# Allegro board KB_GH60.brd
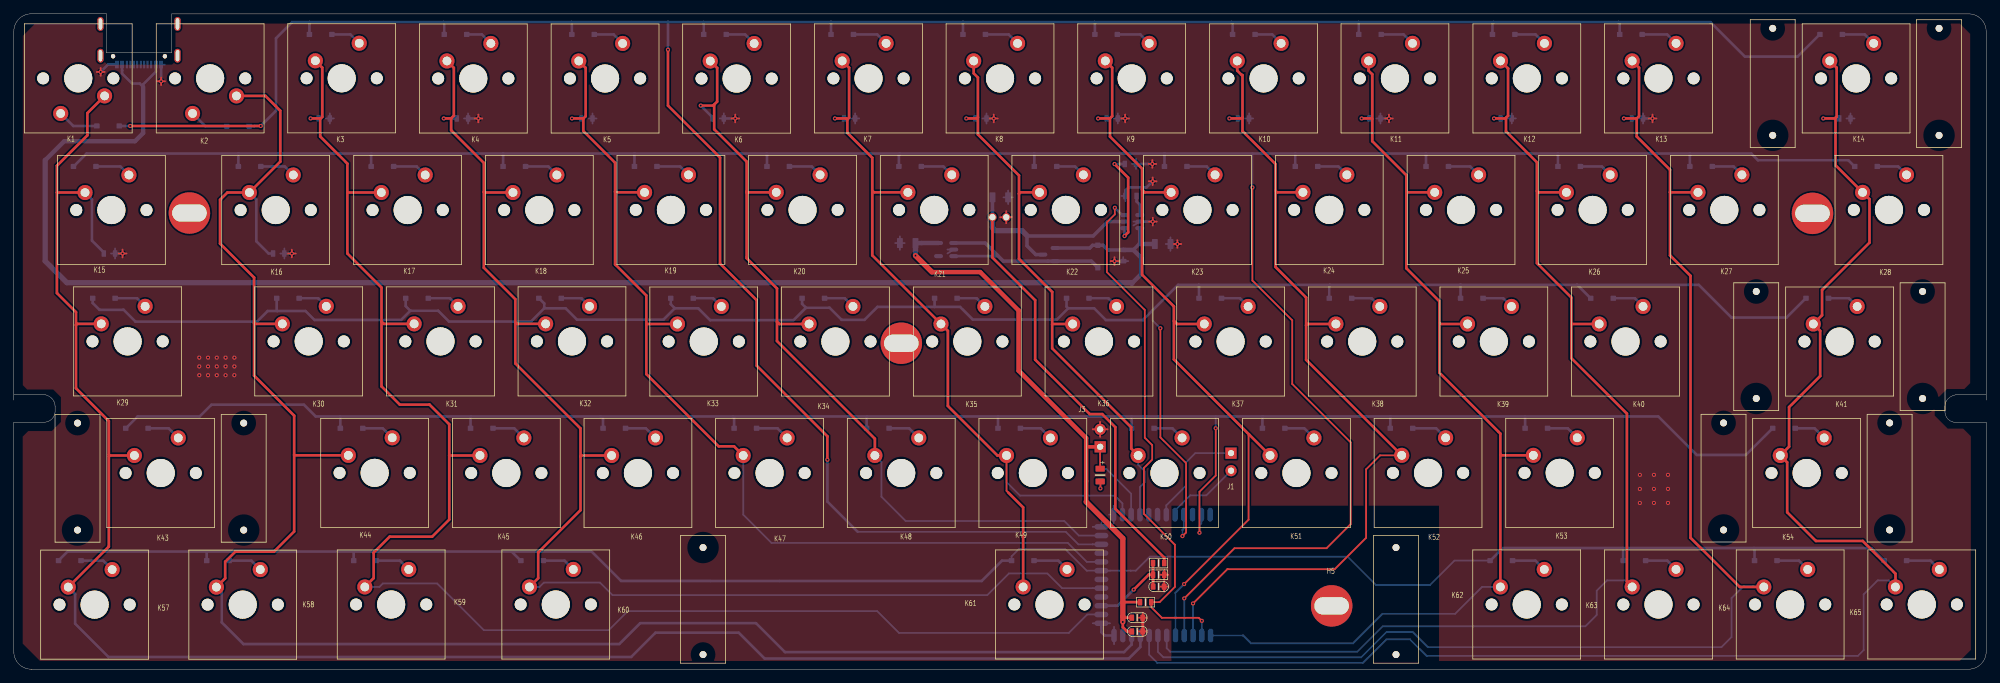
[diagram p0: board, top side]
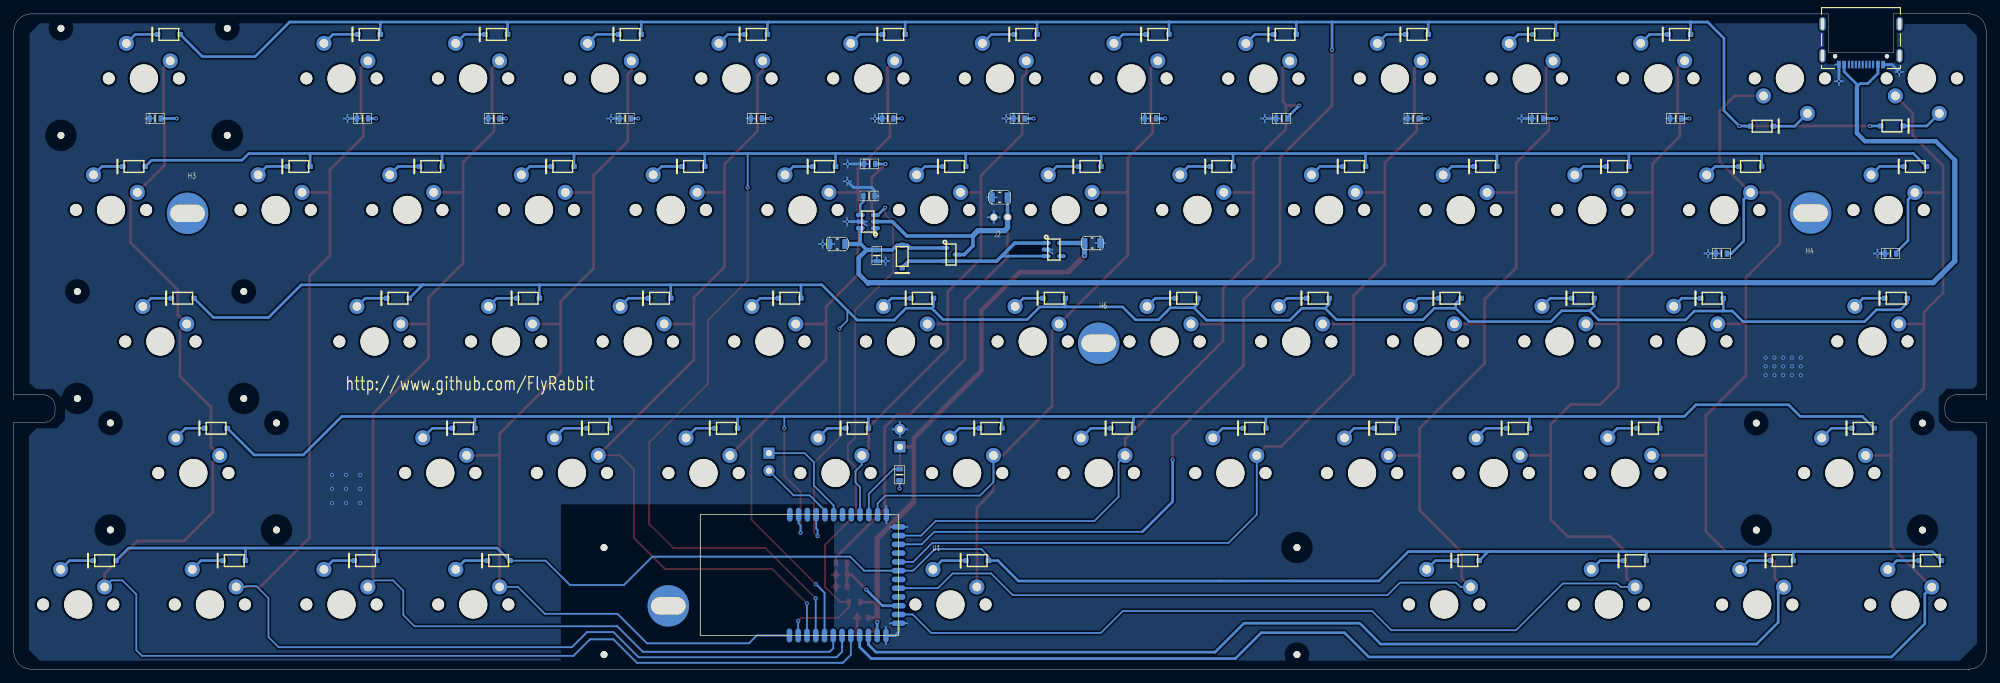
[diagram p1: board, bottom side, seen from below]

Outline 285.35 x 94.93 mm; copper layers: TOP, BOTTOM. Coordinates in mm from the lower left corner of the outline.
Outline path: 0,38.96 0,92.39 arc(0.74,94.19) 2.54,94.93 13.42,94.93 13.42,89.28 22.85,89.28 22.85,94.92 282.81,94.92 arc(284.61,94.18) 285.35,92.38 285.35,38.96 ; 0,35.77 0,35.77 4.36,35.77 arc(5.5,36.24) 5.97,37.38 5.97,38.05 arc(5.85,38.7) 5.48,39.24 arc(4.86,39.66) 4.12,39.81 0,39.81 ; 0,35.77 0,2.53 arc(0.74,0.74) 2.52,0 2.66,0 ; 2.45,0 282.81,0 arc(284.61,0.74) 285.35,2.54 ; 285.35,35.75 280.94,35.75 arc(279.84,36.21) 279.39,37.3 279.39,38.09 arc(279.51,38.67) 279.84,39.16 arc(280.52,39.62) 281.33,39.79 285.34,39.79 ; 285.35,2.5 285.35,35.76

## Design rules (mm)
constraint set DEFAULT: min track width 0.127

## Placement (name value [footprint] x y rotation side)
C1  10uF  [C0805]  166.21 61.58 0 bottom
C2  10uF  [C0805]  142.72 68.35 180 bottom
C3  10uF  [C0805]  129.32 61.72 180 bottom
C5  100nF  [C0603]  162.53 5.47 0 top
C6  10nF  [C0603]  162.53 7.46 0 top
C7  100nF  [C0603]  165.62 11.96 0 top
D6  1N4448W  [SOD123]  13.63 78.68 180 bottom
D7  1N4448W  [SOD123]  32.42 78.65 180 bottom
D8  1N4448W  [SOD123]  44.39 91.94 0 bottom
D9  1N4448W  [SOD123]  63.89 91.94 0 bottom
D10  1N4448W  [SOD123]  82.35 91.94 0 bottom
D11  1N4448W  [SOD123]  101.44 91.94 0 bottom
D12  1N4448W  [SOD123]  119.86 91.94 0 bottom
D13  1N4448W  [SOD123]  138.94 91.94 0 bottom
D14  1N4448W  [SOD123]  158.03 91.94 0 bottom
D15  1N4448W  [SOD123]  177.95 91.94 0 bottom
D16  1N4448W  [SOD123]  196.2 91.94 0 bottom
D17  1N4448W  [SOD123]  215.54 91.94 0 bottom
D18  1N4448W  [SOD123]  233.96 91.94 0 bottom
D19  1N4448W  [SOD123]  262.93 91.94 0 bottom
D20  1N4448W  [SOD123]  10.25 72.82 0 bottom
D21  1N4448W  [SOD123]  34.11 72.82 0 bottom
D22  1N4448W  [SOD123]  53.32 72.82 0 bottom
D23  1N4448W  [SOD123]  72.41 72.82 0 bottom
D24  1N4448W  [SOD123]  91.41 72.82 0 bottom
D25  1N4448W  [SOD123]  110.58 72.82 0 bottom
D26  1N4448W  [SOD123]  129.67 72.82 0 bottom
D27  1N4448W  [SOD123]  149.26 72.82 0 bottom
D28  1N4448W  [SOD123]  168.1 72.82 0 bottom
D29  1N4448W  [SOD123]  187.01 72.82 0 bottom
D30  1N4448W  [SOD123]  205.93 72.82 0 bottom
D31  1N4448W  [SOD123]  225.02 72.82 0 bottom
D32  1N4448W  [SOD123]  244.11 72.82 0 bottom
D33  1N4448W  [SOD123]  267.97 72.82 0 bottom
D34  1N4448W  [SOD123]  13.04 53.73 0 bottom
D35  1N4448W  [SOD123]  39.66 53.73 0 bottom
D36  1N4448W  [SOD123]  58.33 53.73 0 bottom
D37  1N4448W  [SOD123]  77.58 53.73 0 bottom
D38  1N4448W  [SOD123]  96.67 53.73 0 bottom
D39  1N4448W  [SOD123]  115.67 53.73 0 bottom
D40  1N4448W  [SOD123]  134.84 53.73 0 bottom
D41  1N4448W  [SOD123]  153.93 53.73 0 bottom
D42  1N4448W  [SOD123]  173.1 53.73 0 bottom
D43  1N4448W  [SOD123]  191.93 53.73 0 bottom
D44  1N4448W  [SOD123]  210.94 53.73 0 bottom
D45  1N4448W  [SOD123]  229.77 53.73 0 bottom
D46  1N4448W  [SOD123]  260.91 53.73 0 bottom
D47  1N4448W  [SOD123]  17.81 34.89 0 bottom
D48  1N4448W  [SOD123]  48.87 34.89 0 bottom
D49  1N4448W  [SOD123]  67.7 34.89 0 bottom
D50  1N4448W  [SOD123]  86.87 34.89 0 bottom
D51  1N4448W  [SOD123]  105.83 34.89 0 bottom
D52  1N4448W  [SOD123]  125 34.89 0 bottom
D53  1N4448W  [SOD123]  144.01 34.89 0 bottom
D54  1N4448W  [SOD123]  163.35 34.89 0 bottom
D55  1N4448W  [SOD123]  182.26 34.89 0 bottom
D56  1N4448W  [SOD123]  200.77 34.89 0 bottom
D57  1N4448W  [SOD123]  220.27 34.89 0 bottom
D58  1N4448W  [SOD123]  256.1 34.89 0 bottom
D59  1N4448W  [SOD123]  8.1 15.73 0 bottom
D60  1N4448W  [SOD123]  29.53 15.73 0 bottom
D61  1N4448W  [SOD123]  50.79 15.73 0 bottom
D62  1N4448W  [SOD123]  74.98 15.73 0 bottom
D63  1N4448W  [SOD123]  145.97 15.73 0 bottom
D64  1N4448W  [SOD123]  215.21 15.73 0 bottom
D65  1N4448W  [SOD123]  234.46 15.73 0 bottom
D66  1N4448W  [SOD123]  253.46 15.73 0 bottom
D67  1N4448W  [SOD123]  272.22 15.73 0 bottom
D68  LED_G  [LED0805]  157.16 28.12 90 top
D69  1N4448W  [SOD123]  156.83 59.78 270 bottom
H3  HOLE_M2.5X5  [M2D5X5]  260.22 66.03 180 bottom
H4  HOLE_M2.5X5  [M2D5X5]  25.41 66.08 180 bottom
H5  HOLE_M2.5X5  [M2D5X5]  190.66 9.17 0 top
H6  HOLE_M2.5X5  [M2D5X5]  128.4 47.22 180 bottom
J1  -  [HEADER2X1]  176.11 31.3 0 bottom
J2  PH2.0_2X1  [PH2D0_2X1]  141.58 65.47 0 bottom
J3  -  [HEADER2X1]  157.16 32.21 180 bottom
K1  -  [KEYPAD]  9.32 85.58 180 top
K2  -  [KEYPAD]  28.4 85.58 180 top
K3  -  [KEYPAD]  47.43 85.59 0 top
K4  -  [KEYPAD]  66.47 85.56 0 top
K5  -  [KEYPAD]  85.54 85.56 0 top
K6  -  [KEYPAD]  104.57 85.55 0 top
K7  -  [KEYPAD]  123.66 85.57 0 top
K8  -  [KEYPAD]  142.68 85.57 0 top
K9  -  [KEYPAD]  161.73 85.57 0 top
K10  -  [KEYPAD]  180.81 85.57 0 top
K11  -  [KEYPAD]  199.81 85.57 0 top
K12  -  [KEYPAD]  218.9 85.57 0 top
K13  -  [KEYPAD]  237.95 85.57 0 top
K14  -  [KEYPAD]  266.54 85.57 0 top
K15  -  [KEYPAD]  14.12 66.5 0 top
K16  -  [KEYPAD]  37.89 66.5 0 top
K17  -  [KEYPAD]  56.98 66.51 0 top
K18  -  [KEYPAD]  76.02 66.51 0 top
K19  -  [KEYPAD]  95.07 66.53 0 top
K20  -  [KEYPAD]  114.11 66.53 0 top
K21  -  [KEYPAD]  133.16 66.53 0 top
K22  -  [KEYPAD]  152.2 66.53 0 top
K23  -  [KEYPAD]  171.25 66.53 0 top
K24  -  [KEYPAD]  190.31 66.53 0 top
K25  -  [KEYPAD]  209.38 66.53 0 top
K26  -  [KEYPAD]  228.42 66.53 0 top
K27  -  [KEYPAD]  247.47 66.53 0 top
K28  -  [KEYPAD]  271.29 66.53 0 top
K29  -  [KEYPAD]  16.46 47.48 0 top
K30  -  [KEYPAD]  42.66 47.48 0 top
K31  -  [KEYPAD]  61.73 47.48 0 top
K32  -  [KEYPAD]  80.75 47.48 0 top
K33  -  [KEYPAD]  99.82 47.46 0 top
K34  -  [KEYPAD]  118.86 47.46 0 top
K35  -  [KEYPAD]  137.95 47.46 0 top
K36  -  [KEYPAD]  157 47.46 0 top
K37  -  [KEYPAD]  176.04 47.46 0 top
K38  -  [KEYPAD]  195.08 47.46 0 top
K39  -  [KEYPAD]  214.13 47.46 0 top
K40  -  [KEYPAD]  233.17 47.46 0 top
K41  -  [KEYPAD]  264.15 47.46 0 top
K43  -  [KEYPAD]  21.25 28.42 0 top
K44  -  [KEYPAD]  52.21 28.44 0 top
K45  -  [KEYPAD]  71.25 28.42 0 top
K46  -  [KEYPAD]  90.29 28.42 0 top
K47  -  [KEYPAD]  109.34 28.42 0 top
K48  -  [KEYPAD]  128.39 28.42 0 top
K49  -  [KEYPAD]  147.43 28.42 0 top
K50  -  [KEYPAD]  166.48 28.42 0 top
K51  -  [KEYPAD]  185.56 28.42 0 top
K52  -  [KEYPAD]  204.61 28.44 0 top
K53  -  [KEYPAD]  223.65 28.44 0 top
K54  -  [KEYPAD]  259.38 28.42 0 top
K57  -  [KEYPAD]  11.69 9.35 0 top
K58  -  [KEYPAD]  33.12 9.35 0 top
K59  -  [KEYPAD]  54.59 9.37 0 top
K60  -  [KEYPAD]  78.41 9.37 0 top
K61  -  [KEYPAD]  149.84 9.37 0 top
K62  -  [KEYPAD]  218.88 9.37 0 top
K63  -  [KEYPAD]  237.95 9.37 0 top
K64  -  [KEYPAD]  256.99 9.37 0 top
K65  -  [KEYPAD]  276.04 9.37 0 top
NOREF  -  [unnamed]  278.54 85.07 0 top
NOREF#2  -  [unnamed]  33.26 27.9 0 top
NOREF#3  -  [unnamed]  271.38 27.92 0 top
NOREF#4  -  [unnamed]  9.22 27.9 0 top
NOREF#5  -  [unnamed]  99.71 9.87 180 top
NOREF#6  -  [unnamed]  252.09 46.96 0 top
NOREF#7  -  [unnamed]  254.47 85.07 0 top
NOREF#8  -  [unnamed]  199.97 9.87 180 top
NOREF#9  -  [unnamed]  247.35 27.92 0 top
NOREF#10  -  [unnamed]  276.15 46.96 0 top
Q1  DMP3130L-7  [SOT-23-3]  149.76 60.06 270 bottom
R1  100K  [R0603]  13.83 60.21 180 bottom
R2  100K  [R0603]  38.32 60.21 180 bottom
R3  100K  [R0603]  44.91 79.77 180 bottom
R4  100K  [R0603]  64.91 79.77 180 bottom
R5  100K  [R0603]  82.91 79.77 180 bottom
R6  100K  [R0603]  101.91 79.77 180 bottom
R7  100K  [R0603]  120.91 79.77 180 bottom
R8  100K  [R0603]  139.91 79.77 180 bottom
R9  100K  [R0603]  158.91 79.77 180 bottom
R10  100K  [R0603]  177.91 79.77 180 bottom
R11  100K  [R0603]  196.91 79.77 180 bottom
R12  100K  [R0603]  215.91 79.77 180 bottom
R13  100K  [R0603]  234.91 79.77 180 bottom
R14  100K  [R0603]  264.91 79.77 180 bottom
R15  1K  [R0603]  161.62 68.55 0 bottom
R16  100K  [R0603]  163.74 9.71 0 top
R17  10K  [R0603]  161.54 73.19 0 bottom
R20  10K  [R0603]  157.21 28.17 270 bottom
R21  10K  [R0603]  160.5 59.92 90 bottom
R22  1M  [R0603]  165.62 15.37 180 top
R23  1M  [R0603]  165.63 13.68 0 top
U1  -  [NRF51822_MODULE]  157.34 22.38 0 bottom
U2  TPS62200DBVT  [SOT23-5]  134.88 60.78 270 bottom
U3  BQ21040DBVT  [SOT-23-6]  161.79 64.83 90 bottom
U4  USB_C  [TYPE-C-31-M-14]  18.11 91.41 0 bottom

## Library data of the parts
C1-C3 C5-C7 = CAP NP: User Part Number: pn; Tolerance: RichardLC
D6-D67 D69 = DIODE: User Part Number: pn; Tolerance: RichardLC
D68 = LED: User Part Number: pn; Tolerance: RichardLC
H3-H6 = HOLE_M3
J1-J3 = HEADER2X1
K1-K41 K43-K54 K57-K65 = keypad
Q1 = MOSFET P: User Part Number: pn; Tolerance: RichardLC
R1-R17 R20-R23 = RESISTOR: User Part Number: pn; Tolerance: RichardLC
U1 = NRF51822_MODULE
U2 = TPS62200: User Part Number: pn; Tolerance: RichardLC
U3 = BQ21040: User Part Number: pn; Tolerance: RichardLC
U4 = TYPE-C-31-M-14: User Part Number: PN; Tolerance: TOL

## Footprints (pads in the part's own frame, mm; a bottom-side part is the same pattern mirrored in y, then rotated)
C0603
  custom 0.7x0.9 smd: 1(-0.8,0) 2(0.8,0)
C0805
  custom 0.85x1.45 smd: 1(-1.13,0) 2(1.13,0)
HEADER2X1
  rect 1.624x1.624 hole 0.9: 1(0,0)
  round 1.624 hole 0.9: 2(0,2.54)
KEYPAD
  round 1.72 hole 1.72 unplated: (-5.08,0) (5.08,0)
  round 4.064 hole 4.064 unplated: (0,0)
  round 2.184 hole 1.27: 4(2.54,5.08) 5(-3.81,2.54)
LED0805
  custom 0.85x1.35 smd: 1(-0.925,0) 2(0.925,0)
M2D5X5
  round 6 hole 5x2.5: 1(0,0)
NRF51822_MODULE
  oval 0.8x2 smd: 1(15.8,17.5) 2(14.53,17.5) 3(13.26,17.5) 4(11.99,17.5) 5(10.72,17.5) 6(9.45,17.5) 7(8.18,17.5) 8(6.91,17.5) 9(5.64,17.5) 10(4.37,17.5) 11(3.1,17.5) 12(1.83,17.5) 25(1.77,0) 26(3.04,0) 27(4.31,0) 28(5.58,0) 29(6.85,0) 30(8.12,0) 31(9.39,0) 32(10.66,0) 33(11.93,0) 34(13.2,0) 35(14.47,0) 36(15.74,0)
  oval 2x0.8 smd: 13(0,15.73) 14(0,14.46) 15(0,13.19) 16(0,11.92) 17(0,10.65) 18(0,9.38) 19(0,8.11) 20(0,6.84) 21(0,5.57) 22(0,4.3) 23(0,3.03) 24(0,1.76)
PH2D0_2X1
  round 1.2 hole 0.9: 1(0,0) 2(2,0)
R0603
  custom 0.65x0.95 smd: 1(-0.812,0) 2(0.812,0)
SOD123
  custom 0.8x0.75 smd: 1(-1.625,0) 2(1.625,0)
SOT23-5
  oval 0.6x1.3 smd: 1(-0.95,-1.1) 2(0,-1.1) 3(0.95,-1.1) 4(0.95,1.1) 5(-0.95,1.1)
SOT-23-3
  oval 0.6x1.3 smd: 1(-0.95,-0.885) 2(0.95,-0.885) 3(0,0.885)
SOT-23-6
  oval 0.6x1.3 smd: 1(-0.95,-1.1) 2(0,-1.1) 3(0.95,-1.1) 4(0.95,1.1) 5(0,1.1) 6(-0.95,1.1)
TYPE-C-31-M-14
  oval 0.9x2 hole 0.5x1.65: 1(-5.577,2.548) 2(5.579,2.544) 3(-5.577,-2.047) 4(5.573,-2.051)
  round 0.61 hole 0.61: 5(-3.75,2.63) 6(3.75,2.63)
  rect 0.559x1.092 smd: A1B12(-3.2,3.83) A4B9(-2.45,3.83) B1A12(3.2,3.83) B4A9(2.45,3.83)
  rect 0.305x1.092 smd: A5(-1.25,3.83) A6(-0.25,3.83) A7(0.25,3.83) A8(1.25,3.83) B5(1.75,3.83) B6(0.75,3.83) B7(-0.75,3.83) B8(-1.75,3.83)
unnamed
  round 1 hole 3 unplated: (0,7.75)
  round 1 hole 3.98 unplated: (0,-7.75)

## Nets
D3V3: C3.1 C5.1 C6.1 D68.2 J3.1 R16.1 U1.11(VCC) U2.5
GND: C1.2 C2.1 C3.2 C5.2 C6.2 C7.2 J2.2 J3.2 R1.1 R2.1 R3.1 R4.1 R5.1 R6.1 R7.1 R8.1 R9.1 R10.1 R11.1 R12.1 R13.1 R14.1 R15.1 R17.2 R21.1 R23.2 U1.12 U1.13 U1.24 U1.25 U2.2 U3.5 U4.A1B12 U4.B1A12
VBAT: C2.2 J2.1 Q1.3 R22.1 U3.2
VBUS: C1.1 D69.1 Q1.1 R21.2 U3.6 U4.A4B9 U4.B4A9(VBUS_1)
VDD: D69.2(C) Q1.2(SOURCE) U2.1(VIN) U2.3
ADC: C7.1 R22.2 R23.1 U1.15
C1: K1.5 K15.5 K29.5 K43.5 K57.5 R1.2 U1.9
C2: K2.5 K16.5 K30.5 K44.5 K58.5 R2.2 U1.10
C3: K3.5 K17.5 K31.5 K45.5 K59.5 R3.2 U1.14
C4: K4.5 K18.5 K32.5 K46.5 K60.5 R4.2 U1.17
C5: K5.5 K19.5 K33.5 K47.5 R5.2 U1.20
C6: K6.5 K20.5 K34.5 K48.5 R6.2 U1.23
C7: K7.5 K21.5 K35.5 K49.5 K61.5 R7.2 U1.26
C8: K8.5 K22.5 K36.5 K50.5 R8.2 U1.28
C9: K9.5 K23.5 K37.5 K51.5 R9.2 U1.5
C10: K10.5 K24.5 K38.5 K52.5 R10.2 U1.3
C11: K11.5 K25.5 K39.5 K53.5 K62.5 R11.2 U1.1
C12: K12.5 K26.5 K40.5 K63.5 R12.2 U1.6
C13: K13.5 K27.5 K64.5 R13.2 U1.7
C14: K14.5 K28.5 K41.5 K54.5 K65.5 R14.2 U1.8
CHG: R16.2 U1.2 U3.3(\\C\H\G)
R1: D6.1 D7.1 D8.1 D9.1 D10.1 D11.1 D12.1 D13.1 D14.1 D15.1 D16.1 D17.1 D18.1 D19.1 U1.22
R2: D20.1 D21.1 D22.1 D23.1 D24.1 D25.1 D26.1 D27.1 D28.1 D29.1 D30.1 D31.1 D32.1 D33.1 U1.4
R3: D34.1 D35.1 D36.1 D37.1 D38.1 D39.1 D40.1 D41.1 D42.1 D43.1 D44.1 D45.1 D46.1 U1.33
R4: D47.1 D48.1 D49.1 D50.1 D51.1 D52.1 D53.1 D54.1 D55.1 D56.1 D57.1 D58.1 U1.35
R5: D59.1 D60.1 D61.1 D62.1 D63.1 D64.1 D65.1 D66.1 D67.1 U1.19
SWDCLK: J1.2 U1.32
SWDIO: J1.1 U1.31
N29595: D6.2(C) K1.4
N30020: D7.2(C) K2.4
N30323: D8.2(C) K3.4
N30854: D9.2(C) K4.4
N31668: D10.2(C) K5.4
N31769: D11.2(C) K6.4
N32003: D12.2(C) K7.4
N32220: D13.2(C) K8.4
N32445: D14.2(C) K9.4
N32807: D15.2(C) K10.4
N33468: D16.2(C) K11.4
N33965: D17.2(C) K12.4
N34548: D18.2(C) K13.4
N34712: D19.2(C) K14.4
N37140: D20.2(C) K15.4
N37156: D33.2(C) K28.4
N37885: D21.2(C) K16.4
N37889: D22.2(C) K17.4
N37893: D23.2(C) K18.4
N37897: D24.2(C) K19.4
N37901: D25.2(C) K20.4
N37905: D26.2(C) K21.4
N37909: D27.2(C) K22.4
N37913: D28.2(C) K23.4
N37917: D29.2(C) K24.4
N37921: D30.2(C) K25.4
N37925: D31.2(C) K26.4
N37929: D32.2(C) K27.4
N41655: D34.2(C) K29.4
N41746: D35.2(C) K30.4
N41796: D36.2(C) K31.4
N41988: D37.2(C) K32.4
N42035: D38.2(C) K33.4
N42065: D39.2(C) K34.4
N42098: D40.2(C) K35.4
N42134: D41.2(C) K36.4
N42173: D42.2(C) K37.4
N42405: D43.2(C) K38.4
N42450: D44.2(C) K39.4
N42498: D45.2(C) K40.4
N42549: D46.2(C) K41.4
N42959: D47.2(C) K43.4
N42978: D48.2(C) K44.4
N43023: D49.2(C) K45.4
N43049: D50.2(C) K46.4
N43078: D51.2(C) K47.4
N43110: D52.2(C) K48.4
N43145: D53.2(C) K49.4
N43183: D54.2(C) K50.4
N43224: D58.2(C) K54.4
N43268: D57.2(C) K53.4
N43315: D56.2(C) K52.4
N43365: D55.2(C) K51.4
N43658: D59.2(C) K57.4
N43699: D67.2(C) K65.4
N43722: D66.2(C) K64.4
N43748: D65.2(C) K63.4
N43777: D64.2(C) K62.4
N43809: D63.2(C) K61.4
N43844: D62.2(C) K60.4
N43882: D61.2(C) K59.4
N43923: D60.2(C) K58.4
N55988: R15.2 U3.4
N57100: R17.1 U3.1
N89884: R20.1 U1.27
N89888: D68.1(C) R20.2

Pads without a net: H3 1; H4 1; H5 1; H6 1; U1 16 18 21 29 30 34 36; U2 4; U4 1 2 3 4 5 6 A5 A6 A7 A8 B5 B6 B7 B8

## Via types
v1: diameter 0.6, hole 0.3, TOP to BOTTOM, 71 vias

## Routing (per net, layer and track width the routed paths; a pad name or vN(x,y) marks a point on that pad's centre or on a via; arc(x,y) is an arc through that point)
D3V3: length 88.1
  TOP w0.254: D68.2 157.16,31.14 J3.1
  TOP w0.381: R16.1 160.54,9.71 160.44,9.61 ; 160.44,7.65 160.63,7.46 C6.1 ; C5.1 161.07,5.47 160.44,6.09 v1(160.44,6.84) ; 155.17,27.26 155.14,27.23
  TOP w0.508: J3.1 155.19,32.21 155.14,32.25
  TOP w0.635: 132.83,57.53 139.8,57.53 145.37,51.96 145.37,43.24 155.14,33.47 155.14,24.24
  TOP w0.762: v1(130.45,59.9) 132.83,57.53 ; v1(160.44,6.84) 160.44,18.93 155.14,24.24
  BOTTOM w0.381: U1.11 v1(160.44,6.84)
  BOTTOM w0.635: C3.1 131.32,61.72 131.33,61.73 U2.5
  BOTTOM w0.762: C3.1 v1(130.45,59.9)
GND: length 180
  TOP w0.254: 165.82,11.96 C7.2 ; C7.2 167.03,11.96 ; C7.2 166.42,12.67 ; C7.2 166.42,11.26 ; v1(164.78,64.83) 164.78,65.39 ; v1(164.78,64.83) 165.34,64.83 ; v1(164.78,64.83) 164.78,64.28 ; v1(164.78,64.83) 164.23,64.83 ; v1(160.79,79.77) 160.79,80.33 ; v1(160.79,79.77) 160.23,79.77 ; v1(160.79,79.77) 160.79,79.22 ; v1(160.79,79.77) 161.34,79.77 ; v1(141.77,79.77) 141.77,80.33 ; v1(141.77,79.77) 142.33,79.77 ; v1(141.77,79.77) 141.22,79.77 ; v1(141.77,79.77) 141.77,79.22 ; 103.82,79.77 v1(104.37,79.77) ; v1(104.37,79.77) 104.37,80.33 ; v1(104.37,79.77) 104.92,79.77 ; v1(104.37,79.77) 104.37,79.22 ; 12.01,86.51 v1(12.56,86.51) ; v1(12.56,86.51) 12.56,87.07 ; v1(12.56,86.51) 12.56,85.96 ; v1(12.56,86.51) 13.12,86.51 ; v1(159.24,59.11) 159.24,59.66 ; v1(159.24,59.11) 159.24,58.55 ; v1(159.24,59.11) 159.79,59.11 ; v1(159.24,59.11) 158.68,59.11 ; 198.4,79.77 v1(198.95,79.77) ; v1(198.95,79.77) 198.95,79.22 ; v1(198.95,79.77) 199.5,79.77 ; v1(198.95,79.77) 198.95,80.33 ; 157.16,33.68 J3.2 ; J3.2 157.16,35.81 ; J3.2 158.23,34.75 ; J3.2 156.1,34.75 ; 39.67,60.21 v1(40.22,60.21) ; v1(40.22,60.21) 40.22,60.76 ; v1(40.22,60.21) 40.77,60.21 ; v1(40.22,60.21) 40.22,59.66 ; v1(67.21,79.77) 67.77,79.77 ; v1(67.21,79.77) 67.21,80.33 ; v1(67.21,79.77) 66.66,79.77 ; v1(67.21,79.77) 67.21,79.22 ; C6.2 163.33,8.17 ; C6.2 162.73,7.46 ; C6.2 163.94,7.46 ; 164.21,70.67 v1(164.76,70.67) ; v1(164.76,70.67) 164.76,71.22 ; v1(164.76,70.67) 165.32,70.67 ; v1(164.76,70.67) 164.76,70.11 ; v1(168.34,61.58) 168.89,61.58 ; v1(168.34,61.58) 167.79,61.58 ; v1(168.34,61.58) 168.34,61.03 ; v1(168.34,61.58) 168.34,62.14 ; R23.2 166.44,14.41 ; R23.2 165.86,13.68 ; R23.2 166.44,12.95 ; R23.2 167.02,13.68 ; J2.2 143.58,66.32 ; J2.2 143.58,64.61 ; J2.2 144.44,65.47 ; J2.2 142.73,65.47 ; 21.31,84.6 v1(21.31,85.16) ; v1(21.31,85.16) 20.75,85.16 ; v1(21.31,85.16) 21.86,85.16 ; v1(21.31,85.16) 21.31,85.71 ; 15.73,59.66 v1(15.73,60.21) ; v1(15.73,60.21) 15.18,60.21 ; v1(15.73,60.21) 15.73,60.76 ; v1(15.73,60.21) 16.29,60.21 ; v1(164.72,73.19) 164.72,73.74 ; v1(164.72,73.19) 164.17,73.19 ; v1(164.72,73.19) 165.28,73.19 ; v1(164.72,73.19) 164.72,72.63 ; 236.52,79.77 v1(237.08,79.77) ; v1(237.08,79.77) 237.08,80.33 ; v1(237.08,79.77) 237.08,79.22 ; v1(237.08,79.77) 237.63,79.77 ; C5.2 163.94,5.47 ; C5.2 162.73,5.47 ; C5.2 163.33,4.77
  TOP w0.381: C5.2 163.33,6.69 163.33,6.69 C6.2
  BOTTOM w0.254: 140.14,79.77 R8.1 ; R8.1 140.72,79.04 ; R8.1 140.72,80.5 ; 168.34,61.03 v1(168.34,61.58) ; v1(168.34,61.58) 168.34,62.14 ; v1(168.34,61.58) 168.89,61.58 ; v1(12.56,86.51) 12.56,87.07 ; v1(12.56,86.51) 12.56,85.96 ; v1(12.56,86.51) 12.01,86.51 ; v1(12.56,86.51) 13.12,86.51 ; R14.1 265.72,80.5 ; R14.1 266.3,79.77 ; R14.1 265.72,79.04 ; R14.1 265.14,79.77 ; v1(164.72,73.19) 164.72,73.74 ; v1(164.72,73.19) 164.72,72.63 ; v1(164.72,73.19) 165.28,73.19 ; R11.1 197.72,80.5 ; R11.1 197.72,79.04 ; R11.1 197.14,79.77 ; v1(164.76,70.67) 165.32,70.67 ; v1(164.76,70.67) 164.21,70.67 ; v1(164.76,70.67) 164.76,71.22 ; v1(164.76,70.67) 164.76,70.11 ; 67.21,79.22 v1(67.21,79.77) ; v1(67.21,79.77) 67.21,80.33 ; v1(67.21,79.77) 67.77,79.77 ; 45.72,79.04 R3.1 ; R3.1 46.3,79.77 ; R3.1 45.14,79.77 ; R3.1 45.72,80.5 ; 159.24,58.55 v1(159.24,59.11) ; v1(159.24,59.11) 159.24,59.66 ; v1(159.24,59.11) 158.68,59.11 ; 160.79,79.22 v1(160.79,79.77) ; v1(160.79,79.77) 160.79,80.33 ; v1(160.79,79.77) 161.34,79.77 ; v1(104.37,79.77) 104.92,79.77 ; v1(104.37,79.77) 104.37,80.33 ; v1(104.37,79.77) 104.37,79.22 ; R1.1 14.65,60.94 ; R1.1 14.65,59.48 ; R1.1 14.07,60.21 ; 121.14,79.77 R7.1 ; R7.1 122.3,79.77 ; R7.1 121.72,80.5 ; R7.1 121.72,79.04 ; C2.1 144.53,68.35 ; C2.1 143.17,68.35 ; C2.1 143.85,69.33 ; C2.1 143.85,67.37 ; U1.24 158.6,20.62 ; U1.24 157.34,21.28 ; U1.24 156.09,20.62 ; v1(164.78,64.83) 164.78,65.39 ; v1(164.78,64.83) 165.34,64.83 ; v1(164.78,64.83) 164.78,64.28 ; v1(237.08,79.77) 237.63,79.77 ; v1(237.08,79.77) 237.08,80.33 ; v1(237.08,79.77) 237.08,79.22 ; v1(40.22,60.21) 40.22,60.76 ; v1(40.22,60.21) 40.77,60.21 ; v1(40.22,60.21) 40.22,59.66 ; U1.13 158.6,6.65 ; U1.13 156.09,6.65 ; U1.13 157.34,6 ; v1(21.31,85.16) 21.86,85.16 ; v1(21.31,85.16) 21.31,84.6 ; v1(21.31,85.16) 20.75,85.16 ; R4.1 65.72,80.5 ; R4.1 65.14,79.77 ; R4.1 65.72,79.04 ; 198.95,79.22 v1(198.95,79.77) ; v1(198.95,79.77) 198.95,80.33 ; v1(198.95,79.77) 199.5,79.77 ; v1(141.77,79.77) 142.33,79.77 ; v1(141.77,79.77) 141.77,79.22 ; v1(141.77,79.77) 141.77,80.33 ; 159.17,6.14 U1.12 159.17,3.63 ; J3.2 158.23,34.75 ; J3.2 156.1,34.75 ; J3.2 157.16,33.68 ; J3.2 157.16,35.81 ; R12.1 216.72,80.5 ; R12.1 216.72,79.04 ; R12.1 216.14,79.77 ; R12.1 217.3,79.77 ; 135.08,60.78 U2.2 135.08,60.23 ; 167.34,60.61 C1.2 ; C1.2 166.66,61.58 ; C1.2 167.34,62.56 ; 161.78,73.19 R17.2 ; R17.2 162.36,72.46 ; R17.2 162.36,73.91 ; 15.73,59.66 v1(15.73,60.21) ; v1(15.73,60.21) 16.29,60.21 ; v1(15.73,60.21) 15.73,60.76 ; 159.14,79.77 R9.1 ; R9.1 159.72,80.5 ; R9.1 159.72,79.04 ; 143.58,64.61 J2.2 ; J2.2 144.44,65.47 ; J2.2 142.73,65.47 ; J2.2 143.58,66.32 ; R13.1 235.72,80.5 ; R13.1 235.14,79.77 ; R13.1 235.72,79.04 ; U1.25 159.11,23.64 ; U1.25 158.46,22.38 ; U1.25 159.11,21.13 ; 102.14,79.77 R6.1 ; R6.1 102.72,79.04 ; R6.1 102.72,80.5 ; 21.84,87.58 U4.B1A12 21.31,86.78 ; C3.2 128.87,61.72 ; C3.2 128.19,62.7 ; C3.2 128.19,60.74 ; C3.2 127.51,61.72 ; 160.81,67.82 R15.1 ; R15.1 160.81,69.27 ; R15.1 160.23,68.55 ; 160.5,59.68 R21.1 161.23,59.11 ; 39.13,59.48 R2.1 ; R2.1 38.55,60.21 ; R2.1 39.13,60.94 ; 161.99,64.83 U3.5 161.99,64.28 ; 83.72,79.04 R5.1 ; R5.1 83.14,79.77 ; R5.1 83.72,80.5 ; R5.1 84.3,79.77 ; 178.72,79.04 R10.1 ; R10.1 179.3,79.77 ; R10.1 178.14,79.77 ; R10.1 178.72,80.5
  BOTTOM w0.381: R21.1 v1(159.24,59.11) ; R17.2 v1(164.72,73.19) ; R1.1 v1(15.73,60.21) ; U1.13 157.34,5.93 157.34,5.36 157.82,4.88 U1.12 ; v1(21.31,85.16) 21.31,87.58 arc(21.31,87.58) U4.B1A12 ; R11.1 v1(198.95,79.77) ; R13.1 v1(237.08,79.77) ; U4.A1B12 13.63,87.58 v1(12.56,86.51) ; R9.1 v1(160.79,79.77) ; v1(164.76,70.67) 163.88,69.79 161.25,69.79 160.81,69.35 R15.1 ; R2.1 v1(40.22,60.21) ; C1.2 v1(168.34,61.58) ; R8.1 v1(141.77,79.77) ; R4.1 v1(67.21,79.77) ; U3.5 v1(164.78,64.83) ; R6.1 v1(104.37,79.77)
  vias: v1(26.83,45.13) v1(26.83,43.86) v1(26.83,42.59) v1(28.1,45.13) v1(28.1,43.86) v1(28.1,42.59) v1(29.37,45.13) v1(29.37,43.86) v1(29.37,42.59) v1(30.64,45.13) v1(30.64,43.86) v1(30.64,42.59) v1(31.91,45.13) v1(31.91,43.86) v1(31.91,42.59) v1(235.25,28.14) v1(235.25,26.11) v1(235.25,24.08) v1(237.29,28.14) v1(237.29,26.11) v1(237.29,24.08) v1(239.32,28.14) v1(239.32,26.11) v1(239.32,24.08)
VBAT: length 90.6
  TOP w0.381: R22.1 166.43,16.16 159.36,23.24 159.36,35.05 157.46,36.95 155.66,36.95 147.76,44.84 147.76,53.45 141.58,59.63 J2.1
  BOTTOM w0.508: C2.2 141.59,66.45 141.58,66.45 J2.1 ; U3.2 158.24,64.83 156.17,62.75 146.64,62.75 146.58,62.81 146.58,61.32 147.85,60.06 Q1.3
  BOTTOM w0.762: 146.58,62.81 145.86,63.53 142.01,63.53 141.58,63.95 J2.1
VBUS: length 228.2
  BOTTOM w0.381: 20.56,87.58 arc(20.56,87.58) U4.B4A9 20.56,86.55 18.71,84.7 18.71,84.35 18.23,84.83 17.12,84.83 15.66,86.29 15.66,86.72 U4.A4B9 arc(15.66,87.58) 15.66,87.58
  BOTTOM w0.508: R21.2 158.26,60.73 157.58,61.4 D69.1 156.07,61.4 155.67,61.01 150.65,61.01 150.65,61.01 Q1.1 ; U3.6 162.89,61.66 161.96,60.73
  BOTTOM w0.635: R21.2 161.96,60.73 163.12,59.57 163.12,57.24 161.76,55.88 ; 18.71,84.35 18.71,77.65 17.53,76.47 7.29,76.47 4.54,73.73 ; C1.1 162.97,61.58 162.89,61.66
  BOTTOM w0.762: 161.76,55.88 161.67,55.98 7.68,55.98 4.54,59.12 4.54,73.73
VDD: length 28.7
  BOTTOM w0.381: U2.3 142.19,59.83 142.32,59.95
  BOTTOM w0.508: D69.2 156.83,58.18 155.9,59.11 150.65,59.11 Q1.2 149.62,59.11 143.16,59.11 140.54,61.73 U2.1
ADC: length 12.7
  TOP w0.381: R23.1 164.82,14.47 164.81,14.48 R22.2 ; R23.1 164.82,12.89 164.82,12.88 C7.1 ; R23.1 164.17,13.68 v1(162.02,11.52)
  BOTTOM w0.381: v1(162.02,11.52) 159.69,9.19 159.34,9.19 U1.15
C1: length 268.2
  TOP w0.381: K15.5 6.24,69.04 6.23,69.05 ; K29.5 9.15,50.02 8.99,49.87 ; 8.99,49.87 8.99,40.7 13.74,35.94 13.74,31.07 13.86,30.96 ; 8.99,49.87 8.99,51.73 6.23,54.48 6.23,69.05 ; 13.86,30.96 13.74,30.84 13.74,17.76 K57.5 ; 13.86,30.96 K43.5 ; 6.23,69.05 6.23,72.92 10.64,77.32 10.64,80.55 K1.5
  BOTTOM w0.381: U1.9 162.98,3.21 161.32,1.54 108.62,1.54 104.88,5.29 92.84,5.29 89.32,1.77 13.69,1.77 8.87,6.58 8.87,10.89 K57.5 ; K15.5 11.3,68.05 11.3,62.08 13.02,60.36 R1.2
C2: length 259.8
  TOP w0.381: 40.56,31.04 40.56,19.94 37.63,17.02 32.04,17.02 30.58,15.55 30.58,13.16 K58.5 ; 40.56,31.04 40.56,36.72 34.76,42.53 34.76,50.15 ; 40.56,31.04 40.62,30.98 48.4,30.98 ; 34.76,50.15 34.76,56.73 29.84,61.65 29.84,67.99 30.9,69.04 K16.5 38.55,73.51 38.55,80.89 37.83,81.6 37.83,81.61 36.41,83.04 K2.5 ; 34.76,50.15 34.89,50.02 K30.5
  BOTTOM w0.381: K16.5 35.08,68.05 35.08,62 36.87,60.21 R2.2 ; K58.5 30.09,11.11 30.09,6.77 33.22,3.64 87.6,3.64 90.62,6.66 107.38,6.66 111.57,2.47 160.62,2.47 161.71,3.56 U1.10
C3: length 225.6
  TOP w0.381: K3.5 44.62,87.13 44.62,80 44.33,79.7 ; 62.99,30.97 62.99,21.67 60.52,19.2 54.37,19.2 52.05,16.87 52.05,13.18 K59.5 ; 62.99,30.97 63.01,30.96 K45.5 ; 62.99,30.97 62.99,35.48 60.15,38.32 55.84,38.32 53.2,40.96 53.2,50.35 ; 44.33,79.7 44.33,77.17 48.26,73.23 48.26,69.03 ; 44.33,79.7 44.26,79.77 v1(42.93,79.77) ; 53.2,50.35 53.53,50.02 K31.5 ; 53.2,50.35 53.2,55.28 48.26,60.22 48.26,69.03 ; 48.26,69.03 48.28,69.05 K17.5
  BOTTOM w0.254: K59.5 52.89,11.91 53.39,12.42 61.25,12.42 68.01,5.65 86.06,5.65 88.83,8.42 124.91,8.42 128.07,5.25 152.63,5.25 155.3,7.92 U1.14
  BOTTOM w0.381: R3.2 v1(42.93,79.77)
C4: length 189.7
  TOP w0.381: 81.98,30.84 81.98,23.03 75.87,16.92 75.87,13.18 K60.5 ; 81.98,30.84 81.98,34.87 72.56,44.29 72.56,50.22 ; 81.98,30.84 82.1,30.96 K46.5 ; 63.27,79.79 63.66,80.18 63.66,87.1 K4.5 ; 63.27,79.79 63.25,79.77 v1(62.21,79.77) ; 63.27,79.79 63.27,78.07 68,73.34 68,69.13 ; 68,69.13 68.08,69.05 K18.5 ; 68,69.13 68,58.14 72.56,53.58 72.56,50.22 ; 72.56,50.22 72.75,50.02 K32.5
  BOTTOM w0.254: K60.5 76.05,11.91 76.68,12.54 84.82,12.54 86.63,10.72 140.83,10.72 143.97,13.86 149.53,13.86 151.66,11.73 156.09,11.73 U1.17
  BOTTOM w0.381: R4.2 v1(62.21,79.77)
C5: length 143.6
  TOP w0.381: 82.39,79.75 82.39,77.96 86.99,73.36 86.99,69.13 ; 82.39,79.75 82.37,79.77 v1(80.75,79.77) ; 82.39,79.75 82.73,80.1 82.73,87.1 K5.5 ; 86.99,69.13 86.99,58.65 91.51,54.13 91.51,49.95 ; 86.99,69.13 87.05,69.07 K19.5 ; 91.51,49.95 91.56,50 K33.5 ; 91.51,49.95 91.51,42.74 101.97,32.28 104.2,32.28 K47.5
  BOTTOM w0.254: U1.20 155.23,15.54 152.48,18.29 109.62,18.29 105.53,22.38 K47.5
  BOTTOM w0.381: R5.2 v1(80.75,79.77)
C6: length 121.6
  TOP w0.381: K34.5 110.74,50 110.41,50.33 ; K6.5 101.76,87.09 101.76,82.21 101.33,81.78 ; 110.41,50.33 110.41,47.53 124.58,33.37 K48.5 ; 110.41,50.33 110.41,55.15 106.01,59.55 106.01,69.11 ; 101.33,81.78 101.19,81.64 v1(99.38,81.64) ; 101.33,81.78 101.33,78.22 106.01,73.53 106.01,69.11 ; K20.5 106.06,69.07 106.01,69.11
  BOTTOM w0.254: K48.5 125.53,30 125.53,24.97 129.03,21.47 151.97,21.47 154.08,19.35 U1.23
  BOTTOM w0.381: v1(99.38,81.64) 101.1,79.92 R6.2
C7: length 120
  TOP w0.254: K49.5 143.62,25.84 143.86,25.59
  TOP w0.381: 124.19,69.33 124.19,74.08 120.6,77.67 120.6,79.63 ; 124.19,69.33 124.19,59.95 K35.5 135.14,49 135.14,38.13 142.31,30.96 K49.5 ; 124.19,69.33 124.46,69.07 K21.5 ; 143.86,25.59 146.03,23.43 K61.5 ; 120.6,79.63 120.84,79.87 120.84,87.11 K7.5 ; 120.6,79.63 120.46,79.77 v1(118.8,79.77)
  BOTTOM w0.254: K49.5 143.62,27.1 145.57,25.15 159.27,25.15 160.38,24.03 U1.26
  BOTTOM w0.381: R7.2 v1(118.8,79.77)
C8: length 85.3
  TOP w0.381: 145.43,68.88 145.43,71.52 139.48,77.46 139.48,79.94 ; 145.43,68.88 145.61,69.07 K22.5 ; 145.43,68.88 145.43,59.44 150.23,54.63 150.23,49.95 ; K36.5 150.28,50 150.23,49.95 ; 150.23,49.95 150.23,46.47 161.67,35.03 161.67,31.95 K50.5 ; 139.48,79.94 139.31,79.77 v1(137.81,79.77) ; 139.48,79.94 139.48,85.7 138.87,86.31 K8.5
  BOTTOM w0.254: K50.5 162.67,29.61 163.6,28.68 163.6,27.06 162.92,26.39 U1.28
  BOTTOM w0.381: R8.2 v1(137.81,79.77)
C9: length 112.7
  TOP w0.254: v1(169.31,12.33) 178.63,21.65 178.63,33.87 178.73,33.97
  TOP w0.381: K51.5 178.73,33.97 167.84,44.87 167.84,50.45 ; 163.23,69.43 163.6,69.07 K23.5 ; 163.23,69.43 163.23,57.14 167.84,52.54 167.84,50.45 ; 163.23,69.43 163.23,72.5 158.59,77.15 158.59,79.79 ; K9.5 158.91,87.11 158.91,80.11 158.59,79.79 ; 167.84,50.45 168.29,50 K37.5 ; 158.59,79.79 158.57,79.77 v1(156.87,79.77)
  BOTTOM w0.254: U1.5 168.06,11.08 v1(169.31,12.33)
  BOTTOM w0.381: R9.2 v1(156.87,79.77)
C10: length 128.2
  TOP w0.254: v1(170.6,9.52) 175.57,14.49 191.1,14.49 195.64,19.03 195.64,28.95 197.67,30.98 K52.5
  TOP w0.381: 182.53,69.3 182.53,73.17 177.76,77.94 177.76,79.91 ; 182.53,69.3 182.76,69.07 K24.5 ; 182.53,69.3 182.53,58.27 186.97,53.83 186.97,49.82 ; 177.76,79.91 177.62,79.77 v1(175.87,79.77) ; 177.76,79.91 177.76,86.05 177.65,86.05 177,86.7 K10.5 ; K38.5 187.15,50 186.97,49.82 ; 186.97,49.82 186.97,44.81 K52.5
  BOTTOM w0.254: U1.3 v1(170.6,9.52)
  BOTTOM w0.381: R10.2 v1(175.87,79.77)
C11: length 145.6
  TOP w0.381: K53.5 215.16,30.98 215.07,31.07 ; 196.53,79.72 196.53,76.48 201.47,71.54 201.47,69.2 ; 196.53,79.72 196.53,86.18 196,86.7 K11.5 ; 196.53,79.72 196.48,79.77 v1(195,79.77) ; 201.47,69.2 201.6,69.07 K25.5 ; 201.47,69.2 201.47,58.06 206.24,53.29 206.24,50.15 ; K62.5 215.07,31.07 ; 215.07,31.07 215.07,34.12 214.79,34.4 206.24,42.95 206.24,50.15 ; K39.5 206.39,50 206.24,50.15
  BOTTOM w0.254: U1.1 177.86,4.88 178.99,3.75 193.74,3.75 198.02,8.03 208.53,8.03 212.41,11.91 K62.5
  BOTTOM w0.381: R11.2 v1(195,79.77)
C12: length 171.5
  TOP w0.381: 225.34,49.98 225.36,50 K40.5 ; 225.34,49.98 225.34,45.04 233.38,37.01 233.38,12.67 K63.5 ; 225.34,49.98 225.34,53.83 220.36,58.82 220.36,69.23 ; 220.36,69.23 220.52,69.07 K26.5 ; 220.36,69.23 220.36,73.42 215.88,77.9 215.88,79.86 ; K12.5 216.18,87.02 216.18,80.16 215.88,79.86 ; v1(214.15,79.77) 215.79,79.77 215.88,79.86
  BOTTOM w0.254: K63.5 233.18,12.86 230.5,12.86 229.01,11.37 229.01,7.86 227.36,6.22 198.04,6.22 194.35,2.52 167.31,2.52 166.79,3.04 U1.6
  BOTTOM w0.381: R12.2 v1(214.15,79.77)
C13: length 193.3
  TOP w0.381: 239.61,69.08 239.62,69.07 K27.5 ; 239.61,69.08 239.61,72.33 234.8,77.15 234.8,79.75 ; 239.61,69.08 239.61,59.95 242.58,56.98 242.58,19.04 249.71,11.91 K64.5 ; v1(232.94,79.77) 234.78,79.77 234.8,79.75 ; K13.5 235.13,87.11 235.13,80.09 234.8,79.75
  BOTTOM w0.254: K64.5 251.83,11.91 251.71,12.03 250.25,12.03 248.51,10.29 248.51,4.65 247.05,3.19 204.59,3.19 202.4,5.38 198.6,5.38 194.95,1.72 166.32,1.72 165.52,2.52 U1.7
  BOTTOM w0.381: R13.2 v1(232.94,79.77)
C14: length 223.2
  TOP w0.381: K14.5 263.72,87.11 263.72,80.03 263.55,79.86 ; v1(261.79,79.77) 263.47,79.77 263.55,79.86 ; 263.55,79.86 263.55,72.99 K28.5 268.47,68.07 268.47,61.79 261.61,54.93 261.61,51.27 K41.5 261.34,49 261.34,42.46 256.84,37.96 256.84,32.23 K54.5 256.56,29.96 256.56,22.74 260.73,18.57 267.49,18.57 272.23,13.84 K65.5
  BOTTOM w0.254: U1.8 164.25,2.09 165.43,0.92 195.19,0.92 198.59,4.32 202,4.32 204.38,1.93 266.8,1.93 267.63,2.77 267.63,10.85 269.65,12.87 271.27,12.87 K65.5
  BOTTOM w0.381: R14.2 v1(261.79,79.77)
CHG: length 77.6
  TOP w0.254: v1(171.87,7) 171.44,7.44 166.1,7.44 164.55,8.98 R16.2 165.77,9.71 167.98,11.93 167.98,18.03 163.51,22.5 163.51,29.17 164.69,30.35 164.69,32.46 163.63,33.52 163.63,52.02 158.14,57.51 158.14,64.72 159.29,65.87 v1(159.29,66.83)
  BOTTOM w0.254: U1.2 v1(171.87,7)
  BOTTOM w0.381: v1(159.29,66.83) 160.34,65.78 U3.3
R1: length 404.8
  TOP w0.381: v1(16.83,78.68) v1(35.73,78.68) ; v1(117.71,30.34) 117.71,33.73 107.47,43.96 107.47,53.45 102.17,58.75 102.17,74.1 94.64,81.63 v1(94.64,89.72)
  BOTTOM w0.254: U1.22 156.09,18.08 156.09,18.08 154,18.08 152.19,19.9 122.08,19.9
  BOTTOM w0.381: 137.34,93.74 137.32,93.71 D13.1 ; 137.34,93.74 156.37,93.74 ; 137.34,93.74 118.23,93.74 ; D6.1 v1(16.83,78.68) ; 232.15,93.74 245.44,93.74 250.45,88.73 258.06,88.73 261.27,91.94 D19.1 ; 232.15,93.74 214.11,93.74 ; 232.15,93.74 232.33,93.55 232.33,91.94 D18.1 ; D12.1 118.23,93.73 118.23,93.74 ; 214.11,93.74 194.58,93.74 ; 214.11,93.74 213.92,93.55 D17.1 ; 122.08,19.9 117.71,24.27 v1(117.71,30.34) ; 62.15,93.74 62.27,93.61 62.27,91.94 D9.1 ; 62.15,93.74 80.65,93.74 ; 62.15,93.74 42.77,93.74 42.76,93.74 ; D15.1 176.33,93.55 176.14,93.74 ; 80.65,93.74 80.73,93.66 D10.1 ; 80.65,93.74 94.64,93.74 ; 194.58,93.74 194.58,93.73 D16.1 ; 194.58,93.74 176.14,93.74 ; 176.14,93.74 156.37,93.74 ; D14.1 156.41,93.7 156.37,93.74 ; D11.1 99.81,91.94 99.81,93.7 99.78,93.74 ; 42.76,93.74 40.28,93.74 37.93,91.39 37.93,80.89 v1(35.73,78.68) 34.8,78.68 34.76,78.65 D7.1 ; 42.76,93.74 D8.1 ; 118.23,93.74 99.78,93.74 ; 99.78,93.74 94.64,93.74 ; 94.64,93.74 v1(94.64,89.72)
R2: length 375.4
  TOP w0.254: v1(169.33,10.26) 176.6,17.52 189.92,17.52 193.41,21.02 193.41,32.86 184.96,41.32 184.96,50.52 179.19,56.29 v1(179.19,69.78)
  BOTTOM w0.254: U1.4 v1(169.33,10.26) ; 179.19,74.69 v1(179.19,69.78)
  BOTTOM w0.381: 185.4,74.69 185.39,74.68 D29.1 ; 185.4,74.69 204.28,74.69 ; 185.4,74.69 166.47,74.69 ; 242.48,74.69 251.37,74.69 252.34,73.72 265.41,73.72 266.32,72.82 D33.1 ; 242.48,74.69 223.39,74.69 ; 242.48,74.69 242.48,74.69 D32.1 ; D22.1 51.7,74.67 51.72,74.69 ; D23.1 70.78,74.68 70.8,74.69 ; 70.8,74.69 51.72,74.69 ; 70.8,74.69 89.8,74.69 ; 51.72,74.69 32.5,74.69 ; 204.28,74.69 204.31,74.67 D30.1 ; 204.28,74.69 223.39,74.69 ; 32.5,74.69 32.49,74.68 D21.1 ; 32.5,74.69 10.53,74.69 8.65,72.82 D20.1 ; 108.9,74.69 108.96,74.63 108.96,72.82 D25.1 ; 108.9,74.69 128.15,74.69 ; 108.9,74.69 89.8,74.69 ; D26.1 128.05,74.58 128.15,74.69 ; 89.8,74.69 89.79,74.68 D24.1 ; 166.47,74.69 147.62,74.69 ; 166.47,74.69 166.47,74.69 166.47,72.82 D28.1 ; 147.62,74.69 128.15,74.69 ; 147.62,74.69 147.64,74.68 D27.1 ; 223.39,74.69 223.4,74.69 D31.1
R3: length 323.2
  TOP w0.254: v1(169.07,19.28) 169.59,19.79 169.59,29.86 165.88,33.57 v1(165.88,49.39)
  BOTTOM w0.254: v1(165.88,49.39) 164.76,50.5 164.76,51.99 ; U1.33 169.27,20.38 169.07,20.18 v1(169.07,19.28)
  BOTTOM w0.381: D38.1 95.04,52.87 95.64,52.28 ; 133.2,52.48 133.22,52.5 D40.1 ; 133.2,52.48 136.9,52.48 138.74,50.64 150.91,50.64 152.55,52.28 ; 133.2,52.48 124.95,52.48 123.08,50.61 119.77,50.61 118.02,52.35 114.61,52.35 ; 95.64,52.28 99.02,52.28 100.74,50.55 112.81,50.55 114.61,52.35 ; 95.64,52.28 93.98,50.62 81.48,50.62 79.83,52.28 76.74,52.28 ; 152.55,52.28 152.3,52.52 152.3,53.73 D41.1 ; 152.55,52.28 156.29,52.28 158,50.57 163.34,50.57 164.76,51.99 168.45,55.67 171.41,55.67 ; 226.18,55.67 209.3,55.67 ; 226.18,55.67 243.76,55.67 248.5,50.93 256.47,50.93 259.27,53.73 D46.1 ; 226.18,55.67 228.12,53.73 D45.1 ; 209.3,55.67 190.38,55.67 ; 209.3,55.67 209.31,55.66 D44.1 ; D35.1 38.03,53.73 38.03,51.97 38.12,51.88 ; 76.74,52.28 76.74,52.97 75.98,53.73 D37.1 ; 76.74,52.28 74.81,50.35 62.96,50.35 61.4,51.91 57.37,51.91 ; D39.1 114.05,52.91 114.61,52.35 ; D43.1 190.31,53.73 190.31,55.61 190.38,55.67 ; D34.1 11.41,53.04 12.39,52.06 15.88,52.06 17.6,50.34 35.19,50.34 36.72,51.88 38.12,51.88 ; 171.41,55.67 190.38,55.67 ; 171.41,55.67 171.47,55.62 D42.1 ; 57.37,51.91 56.04,50.59 43.5,50.59 42.21,51.88 38.12,51.88 ; 57.37,51.91 56.7,52.58 D36.1
R4: length 282.4
  TOP w0.254: v1(173.89,34.9) 173.89,28.05 171.54,25.7 v1(171.54,19.77)
  BOTTOM w0.254: v1(171.54,19.77) 171.54,20.85 171.81,21.13 U1.35 ; 173.89,36.61 v1(173.89,34.9)
  BOTTOM w0.381: D56.1 199.14,36.56 199.19,36.61 ; 84.9,36.61 66.13,36.61 ; 84.9,36.61 104.02,36.61 ; 84.9,36.61 85.25,36.26 85.25,34.89 D50.1 ; 66.13,36.61 47.19,36.61 ; 66.13,36.61 66.08,36.55 D49.1 ; 123.45,36.61 104.02,36.61 ; 123.45,36.61 142.41,36.61 ; 123.45,36.61 123.38,36.54 D52.1 ; 104.02,36.61 104.21,36.42 D51.1 ; 142.41,36.61 161.68,36.61 ; 142.41,36.61 142.38,36.58 D53.1 ; 161.68,36.61 180.71,36.61 ; 161.68,36.61 161.72,36.57 D54.1 ; 47.19,36.61 47.24,36.56 D48.1 ; 47.19,36.61 43.67,36.61 41.98,38.3 28.59,38.3 26.89,36.61 17.92,36.61 16.21,34.89 D47.1 ; 199.19,36.61 180.71,36.61 ; 199.19,36.61 218.61,36.61 ; 180.71,36.61 180.64,36.54 D55.1 ; D57.1 218.65,36.57 218.61,36.61 ; D58.1 254.45,34.89 250.59,31.04 243.48,31.04 237.91,36.61 218.61,36.61
R5: length 283.8
  BOTTOM w0.254: D64.1 208.42,15.73 204.89,12.19 197.08,12.19 192.97,16.3 164.36,16.3 162.32,14.27 161.58,14.27 161.58,14.27 158.6,14.27 U1.19 155.23,14.27 152.11,17.4 145.39,17.4 144.35,16.35 D63.1
  BOTTOM w0.381: D66.1 251.84,15.73 251.84,17.46 251.76,17.54 ; 72.02,17.04 73.34,15.73 D62.1 ; 72.02,17.04 49.08,17.04 ; 72.02,17.04 83.6,17.04 87.86,12.78 100.75,12.78 110.77,12.77 140.02,12.77 142.97,15.73 D63.1 ; 49.08,17.04 27.87,17.04 ; 49.08,17.04 49.17,16.96 D61.1 ; 27.87,17.04 27.9,17.01 27.9,15.73 D60.1 ; 27.87,17.04 7.77,17.04 6.47,15.75 D59.1 ; 270.59,15.73 270.57,15.73 268.75,17.54 251.76,17.54 ; 232.8,17.54 232.84,17.5 D65.1 ; 232.8,17.54 215.42,17.54 213.61,15.73 D64.1 ; 232.8,17.54 251.76,17.54
SWDCLK: length 11.1
  BOTTOM w0.254: U1.32 168,22.98 170.21,25.19 172.53,25.19 J1.2
SWDIO: length 15.8
  BOTTOM w0.254: J1.1 170.93,31.3 169.6,29.96 169.6,26.59 166.73,23.73 U1.31
N29595: length 6
  BOTTOM w0.381: D6.2 8.59,78.68 K1.4
N30020: length 5.7
  BOTTOM w0.381: D7.2 27.71,78.65 K2.4
N30323: length 4.5
  BOTTOM w0.381: D8.2 48.7,91.94 K3.4
N30854: length 4
  BOTTOM w0.381: K4.4 67.71,91.94 D9.2
N31668: length 4.6
  BOTTOM w0.381: K5.4 86.78,91.94 D10.2
N31769: length 4.6
  BOTTOM w0.381: K6.4 105.8,91.94 D11.2
N32003: length 5.2
  BOTTOM w0.381: K7.4 124.9,91.94 D12.2
N32220: length 5.2
  BOTTOM w0.381: K8.4 143.93,91.94 D13.2
N32445: length 5.1
  BOTTOM w0.381: K9.4 162.97,91.94 D14.2
N32807: length 4.3
  BOTTOM w0.381: K10.4 182.06,91.94 D15.2
N33468: length 5.1
  BOTTOM w0.381: K11.4 201.06,91.94 D16.2
N33965: length 4.8
  BOTTOM w0.381: K12.4 220.15,91.94 D17.2
N34548: length 5.4
  BOTTOM w0.381: D18.2 239.19,91.94 K13.4
N34712: length 5.1
  BOTTOM w0.381: D19.2 267.78,91.94 K14.4
N37140: length 5.3
  BOTTOM w0.381: D20.2 15.42,72.82 K15.4
N37156: length 4.7
  BOTTOM w0.381: K28.4 272.62,72.82 D33.2
N37885: length 5.2
  BOTTOM w0.381: K16.4 39.2,72.82 D21.2
N37889: length 5.1
  BOTTOM w0.381: D22.2 58.29,72.82 K17.4
N37893: length 5
  BOTTOM w0.381: D23.2 77.33,72.82 K18.4
N37897: length 5.1
  BOTTOM w0.381: D24.2 96.4,72.82 K19.4
N37901: length 4.9
  BOTTOM w0.381: K20.4 115.44,72.82 D25.2
N37905: length 4.9
  BOTTOM w0.381: K21.4 134.49,72.82 D26.2
N37909: length 4.4
  BOTTOM w0.381: D27.2 153.53,72.82 K22.4
N37913: length 4.6
  BOTTOM w0.381: D28.2 172.58,72.82 K23.4
N37917: length 4.7
  BOTTOM w0.381: K24.4 191.64,72.82 D29.2
N37921: length 4.9
  BOTTOM w0.381: K25.4 210.71,72.82 D30.2
N37925: length 4.8
  BOTTOM w0.381: K26.4 229.75,72.82 D31.2
N37929: length 4.8
  BOTTOM w0.381: K27.4 248.8,72.82 D32.2
N41655: length 4.8
  BOTTOM w0.381: D34.2 17.83,53.73 K29.4
N41746: length 4.4
  BOTTOM w0.381: K30.4 44.03,53.73 41.28,53.73
N41796: length 4.8
  BOTTOM w0.381: K31.4 63.1,53.73 D36.2
N41988: length 4.6
  BOTTOM w0.381: D37.2 82.12,53.73 K32.4
N42035: length 4.6
  BOTTOM w0.381: K33.4 101.17,53.73 D38.2
N42065: length 4.6
  BOTTOM w0.381: D39.2 120.21,53.73 K34.4
N42098: length 4.5
  BOTTOM w0.381: K35.4 139.3,53.73 D40.2
N42134: length 4.5
  BOTTOM w0.381: D41.2 158.35,53.73 K36.4
N42173: length 4.3
  BOTTOM w0.381: D42.2 177.39,53.73 K37.4
N42405: length 4.6
  BOTTOM w0.381: K38.4 196.43,53.73 D43.2
N42450: length 4.6
  BOTTOM w0.381: D44.2 215.48,53.73 K39.4
N42498: length 4.8
  BOTTOM w0.381: D45.2 234.53,53.73 K40.4
N42549: length 4.6
  BOTTOM w0.381: K41.4 265.5,53.73 D46.2
N42959: length 4.9
  BOTTOM w0.381: K43.4 22.39,34.89 D47.2
N42978: length 4.8
  BOTTOM w0.381: D48.2 53.37,34.89 K44.4
N43023: length 5
  BOTTOM w0.381: K45.4 72.39,34.89 D49.2
N43049: length 4.9
  BOTTOM w0.381: D50.2 91.44,34.89 K46.4
N43078: length 5
  BOTTOM w0.381: K47.4 110.48,34.89 D51.2
N43110: length 4.9
  BOTTOM w0.381: K48.4 129.53,34.89 D52.2
N43145: length 4.9
  BOTTOM w0.381: D53.2 148.57,34.89 K49.4
N43183: length 4.6
  BOTTOM w0.381: D54.2 167.62,34.89 K50.4
N43224: length 4.8
  BOTTOM w0.381: D58.2 260.52,34.89 K54.4
N43268: length 4.9
  BOTTOM w0.381: K53.4 224.81,34.89 D57.2
N43315: length 5.3
  BOTTOM w0.381: K52.4 205.77,34.89 D56.2
N43365: length 4.8
  BOTTOM w0.381: D55.2 186.7,34.89 K51.4
N43658: length 5
  BOTTOM w0.381: D59.2 12.93,15.73 K57.4
N43699: length 5.3
  BOTTOM w0.381: D67.2 277.3,15.73 K65.4
N43722: length 5
  BOTTOM w0.381: K64.4 258.26,15.73 D66.2
N43748: length 4.9
  BOTTOM w0.381: D65.2 239.21,15.73 K63.4
N43777: length 5.1
  BOTTOM w0.381: K62.4 220.15,15.73 D64.2
N43809: length 5.3
  BOTTOM w0.381: K61.4 151.1,15.73 D63.2
N43844: length 4.9
  BOTTOM w0.381: D62.2 79.67,15.73 K60.4
N43882: length 5.2
  BOTTOM w0.381: D61.2 55.86,15.73 K59.4
N43923: length 5
  BOTTOM w0.381: D60.2 34.36,15.73 K58.4
N55988: length 3
  BOTTOM w0.381: R15.2 162.43,67.75 162.89,67.29 U3.4
N57100: length 14.1
  TOP w0.381: v1(159.25,73.17) 161.22,71.2 161.22,63.26 v1(160.69,62.74)
  BOTTOM w0.381: U3.1 v1(160.69,62.74) ; v1(159.25,73.17) 160.07,73.17 160.09,73.19 R17.1
N89884: length 9
  BOTTOM w0.254: U1.27 161.65,25.41 158.08,28.98 R20.1
N89888: length 2.2
  TOP w0.254: v1(157.21,26.18) 157.21,27.15 D68.1
  BOTTOM w0.254: R20.2 v1(157.21,26.18)

## Copper pours and planes (outline as drawn; the poured copper is in the pictures)
GND on TOP: 3.8,1.19 1.28,3.7 1.28,33.69 2.08,34.49 5.49,34.49 6.82,35.82 6.82,39.4 5.71,40.51 1.93,40.51 1.3,41.14 1.3,91.73 2.98,93.42 12.01,93.42 12.89,92.53 12.89,88.23 13.54,87.58 22.9,87.58 23.39,88.06 23.39,92.99 23.92,93.52 281.53,93.52 283.03,92.02 283.03,41.43 282.19,40.58 279.67,40.58 277.91,38.82 277.91,36.73 279.79,34.85 282.02,34.85 283.13,33.74 283.13,2.78 281.53,1.19 206.19,1.19 206.19,23.68 167.48,23.68 167.48,1.19 ; 1 cut-out
GND on BOTTOM: 3.84,1.22 1.32,3.74 1.32,33.73 2.12,34.53 5.53,34.53 6.86,35.85 6.86,39.43 5.69,40.61 1.91,40.61 1.35,41.18 1.35,91.77 3.03,93.45 12.05,93.45 12.93,92.57 12.93,88.26 13.58,87.61 22.94,87.61 23.43,88.09 23.43,93.03 23.96,93.56 281.58,93.56 283.08,92.06 283.08,41.47 282.2,40.58 279.68,40.58 277.95,38.85 277.95,36.1 279.16,34.89 282.06,34.89 283.17,33.77 283.17,2.82 281.58,1.22 206.21,1.22 206.21,23.89 166.69,23.89 166.69,2.61 166.41,2.88 166.41,3.75 166.32,3.83 166.24,3.93 166.16,3.97 166.07,3.93 166,3.83 165.91,3.75 165.91,2.68 166.48,2.1 166.69,2.1 166.69,1.22 ; 5 cut-outs

## Text on the board
Ref Des/Silkscreen Bottom: http://www.github.com/FlyRabbit
